# EAGLE board tick-mk-1.2 (EAGLE 6.5.0)
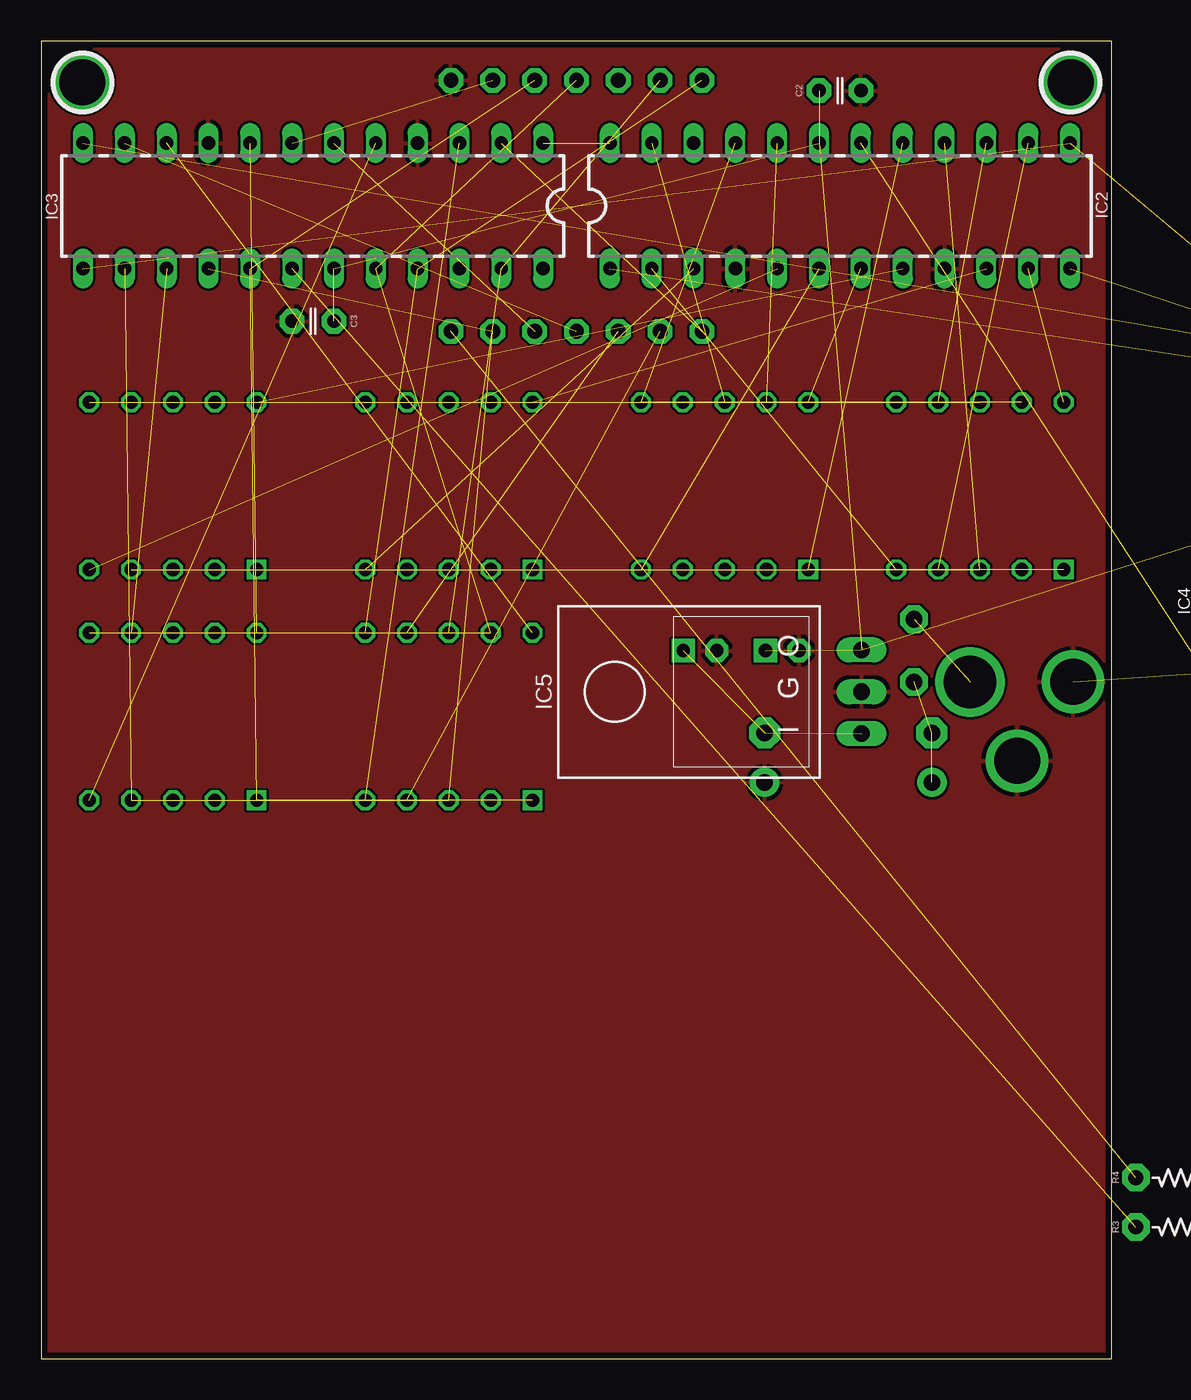
[diagram p0: board, top side]
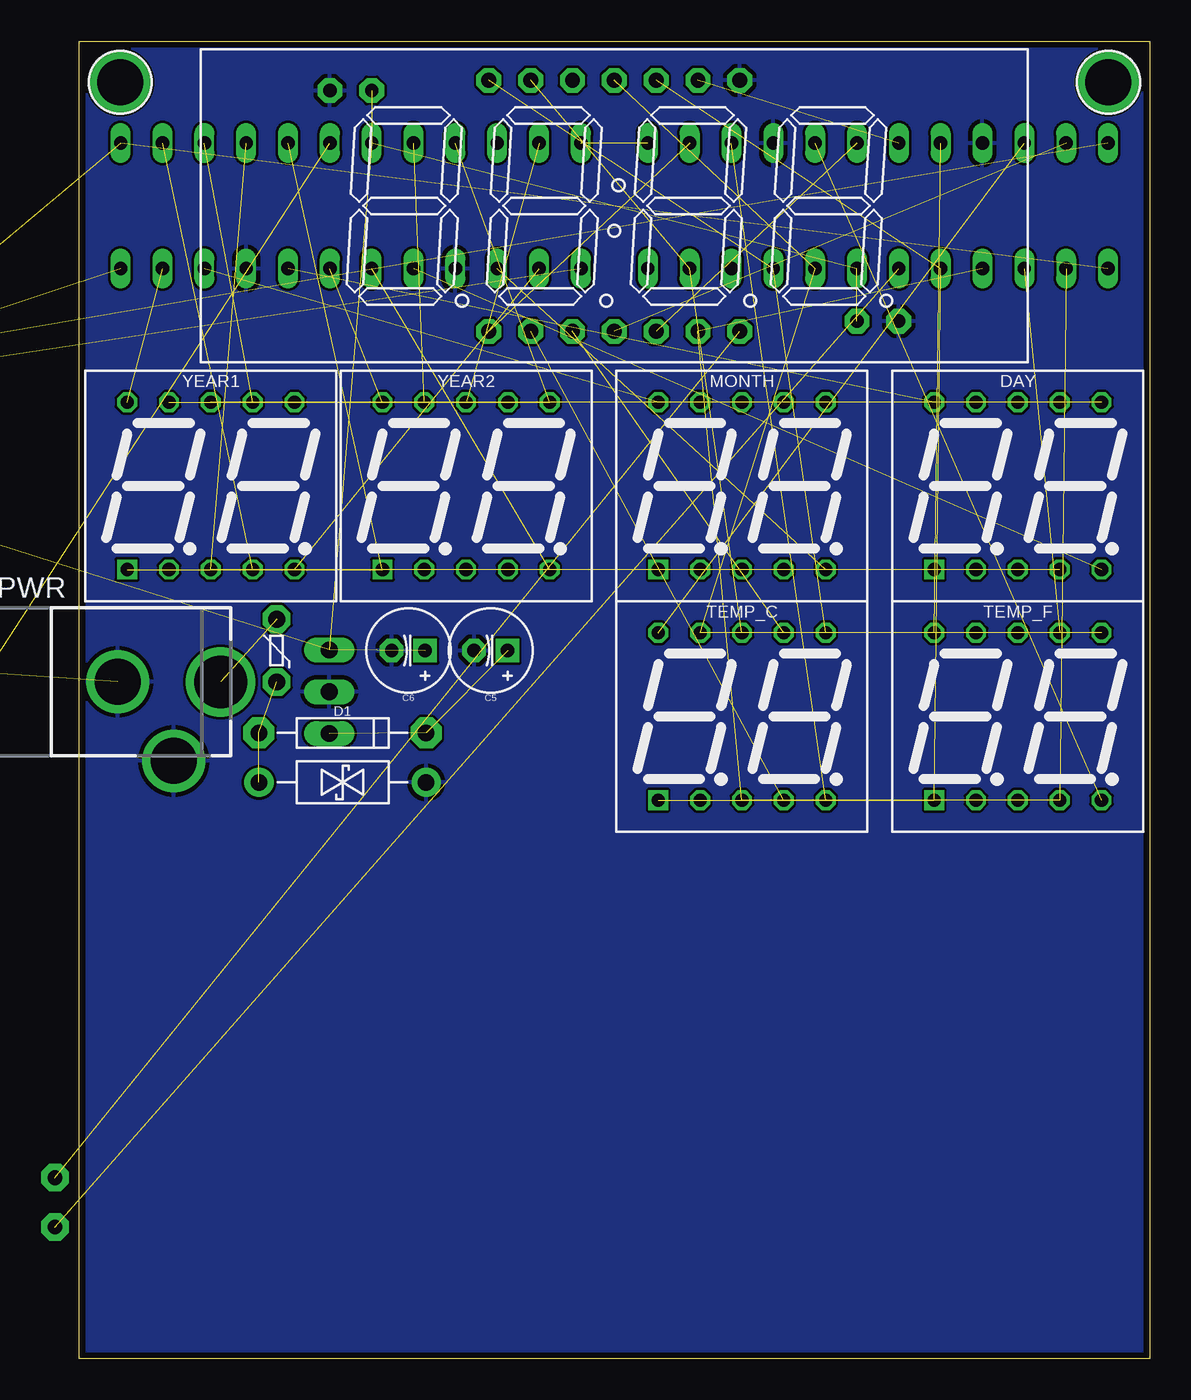
[diagram p1: board, bottom side, seen from below]

Size 65 x 80 mm. Coordinates in mm from the lower left corner, seen from the top.
Outline: 0,0 65,0 65,80 0,80 0,0
Copper layers (1*16): Top 0.0356mm / dielectric 1.5011mm / Bottom 0.0356mm
Design rules "LaenPCBOrder2": minimum track width 6mil, minimum drill 13mil, track to track 6mil, track to pad 6mil, pad to pad 6mil, via to via 6mil, smd to smd 6mil, copper to edge 15mil, drill to drill 6mil, minimum pad ring 7mil, minimum via ring 7mil, stop-mask expansion 3mil, vias tented up to drill 20mil, thermal gap 10mil

## Footprints (pad centres in the part's own frame; a part is rotated, then mirrored left to right if it is on the bottom)
JST-2-PH-VERT-PTH = drill 0.9 octagon: 1 -1,0; 2 1,0
C025-024X044 = drill 0.813 pad 1.5 octagon: 1 -1.27,0; 2 1.27,0
E2-5 = drill 0.813 pad 1.422 square: + -1.016,0 | drill 0.813 pad 1.422 octagon: - 1.016,0
DIODE-10.16MM = drill 1 pad 1.88 octagon: A -5.08,0; C 5.08,0
7SEG_2DIG_14MM = drill 0.8 square: 1 -5.08,-5.08 | drill 0.8 octagon: 2 -2.54,-5.08; 3 0,-5.08; 4 2.54,-5.08; 5 5.08,-5.08; 6 5.08,5.08; 7 2.54,5.08; 8 0,5.08; 9 -2.54,5.08; 10 -5.08,5.08
PTC = drill 1.016 pad 1.676 octagon: P$1 -1.905,0; P$2 1.905,0
HOLE-#2 = drill 2.8 pad 3.81: P$1 0,0
DIL14 = drill 0.813 long: 1 -8.89,-3.81; 2 -6.35,-3.81; 3 -3.81,-3.81; 4 -1.27,-3.81; 5 1.27,-3.81; 6 3.81,-3.81; 7 6.35,-3.81; 8 6.35,3.81; 9 3.81,3.81; 10 1.27,3.81; 11 -1.27,3.81; 12 -3.81,3.81; 13 -6.35,3.81; 14 -8.89,3.81
DIL24 = drill 0.813 long: 1 -13.97,-3.81; 2 -11.43,-3.81; 3 -8.89,-3.81; 4 -6.35,-3.81; 5 -3.81,-3.81; 6 -1.27,-3.81; 7 1.27,-3.81; 8 3.81,-3.81; 9 6.35,-3.81; 10 8.89,-3.81; 11 11.43,-3.81; 12 13.97,-3.81; 13 13.97,3.81; 14 11.43,3.81; 15 8.89,3.81; 16 6.35,3.81; 17 3.81,3.81; 18 1.27,3.81; 19 -1.27,3.81; 20 -3.81,3.81; 21 -6.35,3.81; 22 -8.89,3.81; 23 -11.43,3.81; 24 -13.97,3.81
DIL08 = drill 0.813 long: 1 -3.81,-3.81; 2 -1.27,-3.81; 3 1.27,-3.81; 4 3.81,-3.81; 5 3.81,3.81; 6 1.27,3.81; 7 -1.27,3.81; 8 -3.81,3.81
78XXL = drill 1.016 long: GND 0,-3.81; IN -2.54,-3.81; OUT 2.54,-3.81
DCJACK_2MM_PTH = drill 2.8: GND 0,7.35; GNDBREAK 4.8,10.75 | drill 3.2: PWR 0,13.6
RESISTOR-AXIAL-PTH-5.08MM = drill 0.9 pad 1.676 octagon: P$1 -2.54,0; P$2 2.54,0
7SEG_4DIG = drill 0.9 pad 1.5 octagon: P$1 -7.62,7.62; P$2 -5.08,7.62; P$3 -2.54,7.62; P$4 0,7.62; P$5 2.54,7.62; P$6 5.08,7.62; P$7 7.62,7.62; P$8 7.62,-7.62; P$9 5.08,-7.62; P$10 2.54,-7.62; P$11 0,-7.62; P$12 -2.54,-7.62; P$13 -5.08,-7.62; P$14 -7.62,-7.62
DO-41-TVS = drill 1 pad 1.778: P$1 -5.08,0; P$2 5.08,0
TC26H = drill 0.8 pad 1.5: 1 -1.27,0; 2 1.27,0

## Placement (x,y rotation side)
BATT  M02JST-PTH-VERT  [JST-2-PH-VERT-PTH]  88,40 270 top  (outside the outline)
C1  0.1uF  [C025-024X044]  78,59 90 top  (outside the outline)
C2  0.1uF  [C025-024X044]  48.5,77 0 top
C3  0.1uF  [C025-024X044]  16.5,63 180 top
C4  0.1uF  [C025-024X044]  94,72 0 top  (outside the outline)
C5  10uF  [E2-5]  40,43 180 bottom
C6  100uF  [E2-5]  45,43 180 bottom
D1  1N4007  [DIODE-10.16MM]  49,38 0 bottom
DAY  7SEG_2DIG  [7SEG_2DIG_14MM]  8,53 0 bottom
F1  500mA  [PTC]  53,43 270 bottom
H1  HOLE#2  [HOLE-#2]  2.5,77.5 0 top
H2  HOLE#2  [HOLE-#2]  62.5,77.5 0 top
IC1  ATTINY84  [DIL14]  83,56 0 top  (outside the outline)
IC2  MAX7219  [DIL24]  48.5,70 0 top
IC3  MAX7219  [DIL24]  16.5,70 180 top
IC4  DS1307  [DIL08]  75,46 0 top  (outside the outline)
IC5  L7805  [78XXL]  46,40.5 90 top
MONTH  7SEG_2DIG  [7SEG_2DIG_14MM]  24.75,53 0 bottom
PWR  [DCJACK_2MM_PTH]  70,41.1 270 bottom
R1  10k  [RESISTOR-AXIAL-PTH-5.08MM]  77.74,23.04 180 top  (outside the outline)
R2  10k  [RESISTOR-AXIAL-PTH-5.08MM]  77,28 180 top  (outside the outline)
R3  10k  [RESISTOR-AXIAL-PTH-5.08MM]  69,8 0 top
R4  10k  [RESISTOR-AXIAL-PTH-5.08MM]  69,11 0 top
R5  4.7k  [RESISTOR-AXIAL-PTH-5.08MM]  77,34 180 top  (outside the outline)
R6  4.7k  [RESISTOR-AXIAL-PTH-5.08MM]  77,31 0 top  (outside the outline)
TEMP_C  7SEG_2DIG  [7SEG_2DIG_14MM]  24.75,39 0 bottom
TEMP_F  7SEG_2DIG  [7SEG_2DIG_14MM]  8,39 0 bottom
TIME  7SED_4DIGIT_14MM14.2MM-CC  [7SEG_4DIG]  32.5,70 0 bottom
TVS1  [DO-41-TVS]  49,35 180 bottom
Y1  32.768kHz  [TC26H]  73,39 180 top  (outside the outline)
YEAR1  7SEG_2DIG  [7SEG_2DIG_14MM]  57,53 0 bottom
YEAR2  7SEG_2DIG  [7SEG_2DIG_14MM]  41.5,53 0 bottom

## Library data of the parts
BATT C1-C6 D1 DAY F1 H1 H2 IC1-IC5 MONTH PWR R1-R6 TEMP_C TEMP_F TIME TVS1 Y1 YEAR1 YEAR2 = A_butts

## Nets
A1: DAY.4 IC2.14 MONTH.4 YEAR1.4 YEAR2.4
A2: IC3.14 TEMP_C.4 TEMP_F.4 TIME.P$13
B1: DAY.3 IC2.16 MONTH.3 YEAR1.3 YEAR2.3
B2: IC3.16 TEMP_C.3 TEMP_F.3 TIME.P$9
C1: DAY.9 IC2.20 MONTH.9 YEAR1.9 YEAR2.9
C2: IC3.20 TEMP_C.9 TEMP_F.9 TIME.P$4
D1: DAY.8 IC2.23 MONTH.8 YEAR1.8 YEAR2.8
D2: IC3.23 TEMP_C.8 TEMP_F.8 TIME.P$2
DIN: IC1.13 IC2.1
DY1: DAY.5 IC2.5
DY2: DAY.10 IC2.8
E1: DAY.6 IC2.21 MONTH.6 YEAR1.6 YEAR2.6
E2: IC3.21 TEMP_C.6 TEMP_F.6 TIME.P$1
F1: DAY.7 IC2.15 MONTH.7 YEAR1.7 YEAR2.7
F2: IC3.15 TEMP_C.7 TEMP_F.7 TIME.P$12
G1: DAY.1 IC2.17 MONTH.1 YEAR1.1 YEAR2.1
G2: IC3.17 TEMP_C.1 TEMP_F.1 TIME.P$5
GND: BATT.2 C1.2 C2.2 C3.2 C4.2 C5.- C6.- IC1.14 IC2.4 IC2.9 IC3.4 IC3.9 IC4.4 IC5.GND PWR.GND PWR.GNDBREAK TIME.P$7 TVS1.P$1
HR1: IC3.2 TIME.P$14
HR2: IC3.11 TIME.P$11
LOAD1: IC1.11 IC2.12
LOAD2: IC1.10 IC3.12
MI1: IC3.6 TIME.P$10
MI2: IC3.7 TIME.P$6
MN1: IC2.3 MONTH.5
MN2: IC2.10 MONTH.10
N$1: IC1.4 R1.P$1
N$2: IC2.18 R2.P$1
N$3: IC4.1 Y1.2
N$4: BATT.1 IC4.3
N$5: IC4.2 Y1.1
N$6: C5.+ D1.C IC5.IN
N$7: F1.P$1 PWR.PWR
N$8: D1.A F1.P$2 TVS1.P$2
N$13: IC2.24 IC3.1
N$17: IC3.18 R3.P$1
N$18: R4.P$1 TIME.P$8
SCK: IC1.12 IC2.13 IC3.13
SCL: IC1.9 IC4.6 R6.P$1
SDA: IC1.7 IC4.5 R5.P$1
TC1: IC3.3 TEMP_C.5
TC2: IC3.10 TEMP_C.10
TF1: IC3.5 TEMP_F.5
TF2: IC3.8 TEMP_F.10
VCC: C1.1 C2.1 C3.1 C4.1 C6.+ IC1.1 IC2.19 IC3.19 IC4.8 IC5.OUT R1.P$2 R2.P$2 R3.P$2 R4.P$2 R5.P$2 R6.P$2
YR1: IC2.2 YEAR1.5
YR2: IC2.11 YEAR1.10
YR3: IC2.6 YEAR2.5
YR4: IC2.7 YEAR2.10

## Tracks (layer width: path | path; a pad name or v marks a point on that pad's centre or on a via)
A1  (4 unrouted)
A2  (3 unrouted)
B1  (4 unrouted)
B2  (3 unrouted)
C1  (4 unrouted)
C2  (3 unrouted)
D1  (4 unrouted)
D2  (3 unrouted)
DIN  (1 unrouted)
DY1  (1 unrouted)
DY2  (1 unrouted)
E1  (4 unrouted)
E2  (3 unrouted)
F1  (4 unrouted)
F2  (3 unrouted)
G1  (4 unrouted)
G2  (3 unrouted)
GND  (5 unrouted)
  pour Top: 0,0 0,80 65,80 65,0
  pour Bottom: 0,0 0,80 65,80 65,0
HR1  (1 unrouted)
HR2  (1 unrouted)
LOAD1  (1 unrouted)
LOAD2  (1 unrouted)
MI1  (1 unrouted)
MI2  (1 unrouted)
MN1  (1 unrouted)
MN2  (1 unrouted)
N$1  (1 unrouted)
N$2  (1 unrouted)
N$3  (1 unrouted)
N$4  (1 unrouted)
N$5  (1 unrouted)
N$6  (2 unrouted)
N$7  (1 unrouted)
N$8  (2 unrouted)
N$13  (1 unrouted)
N$17  (1 unrouted)
N$18  (1 unrouted)
SCK  (2 unrouted)
SCL  (2 unrouted)
SDA  (2 unrouted)
TC1  (1 unrouted)
TC2  (1 unrouted)
TF1  (1 unrouted)
TF2  (1 unrouted)
VCC  (15 unrouted)
YR1  (1 unrouted)
YR2  (1 unrouted)
YR3  (1 unrouted)
YR4  (1 unrouted)